# EAGLE board testv1 (EAGLE 6.3)
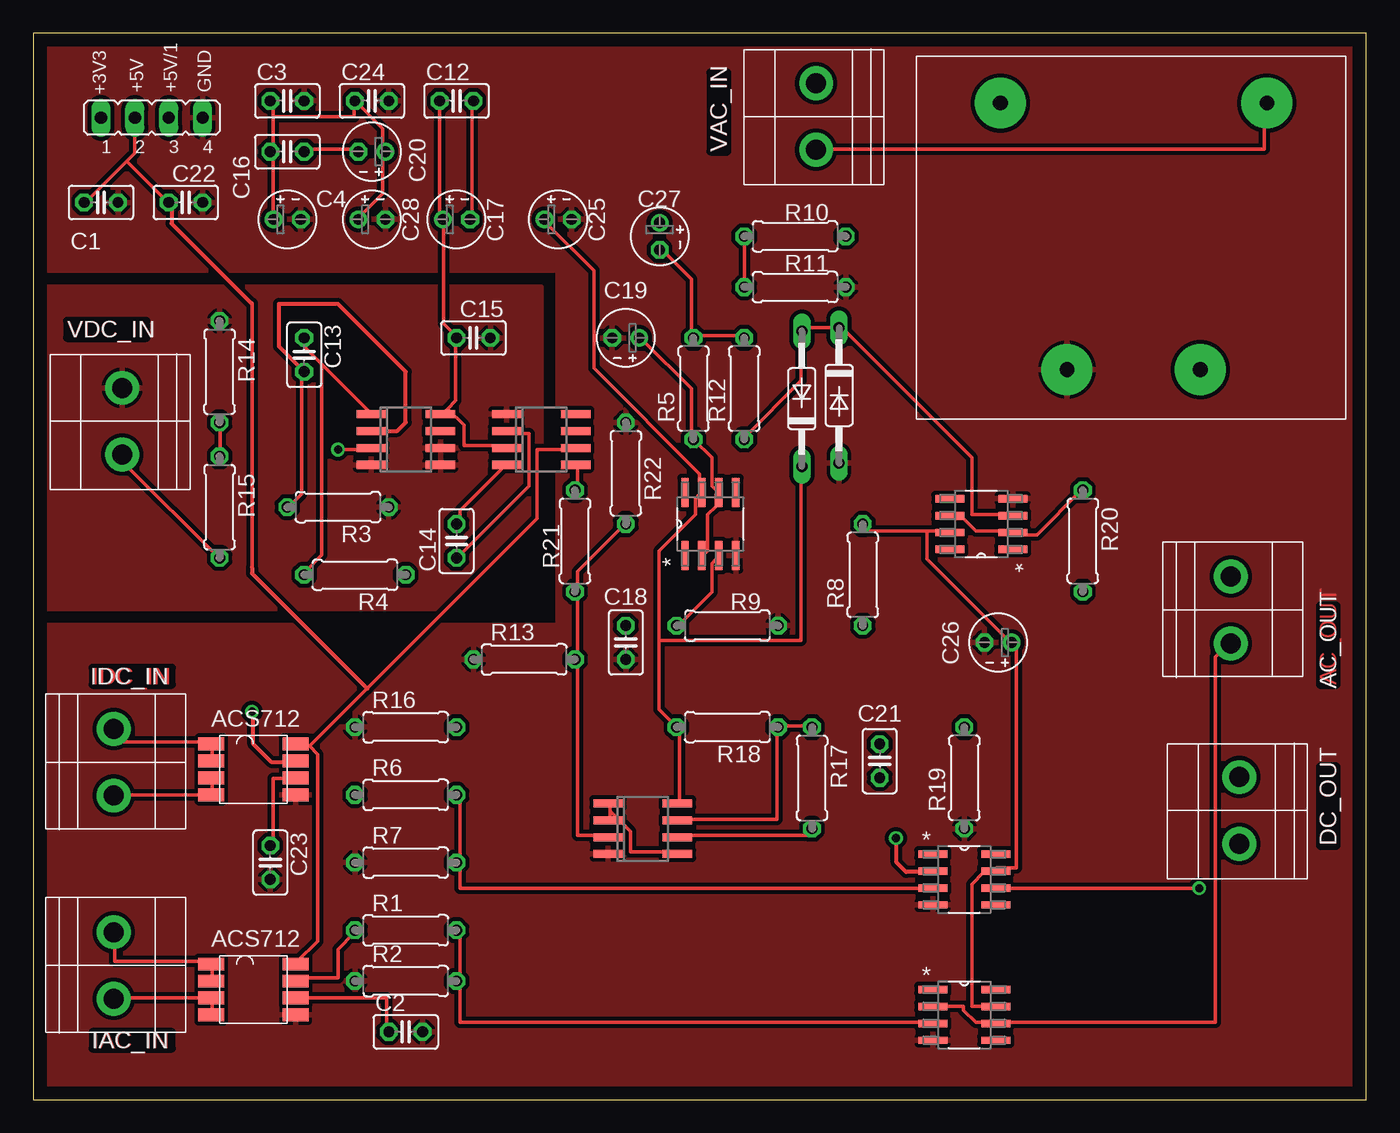
[diagram p0: board, top side]
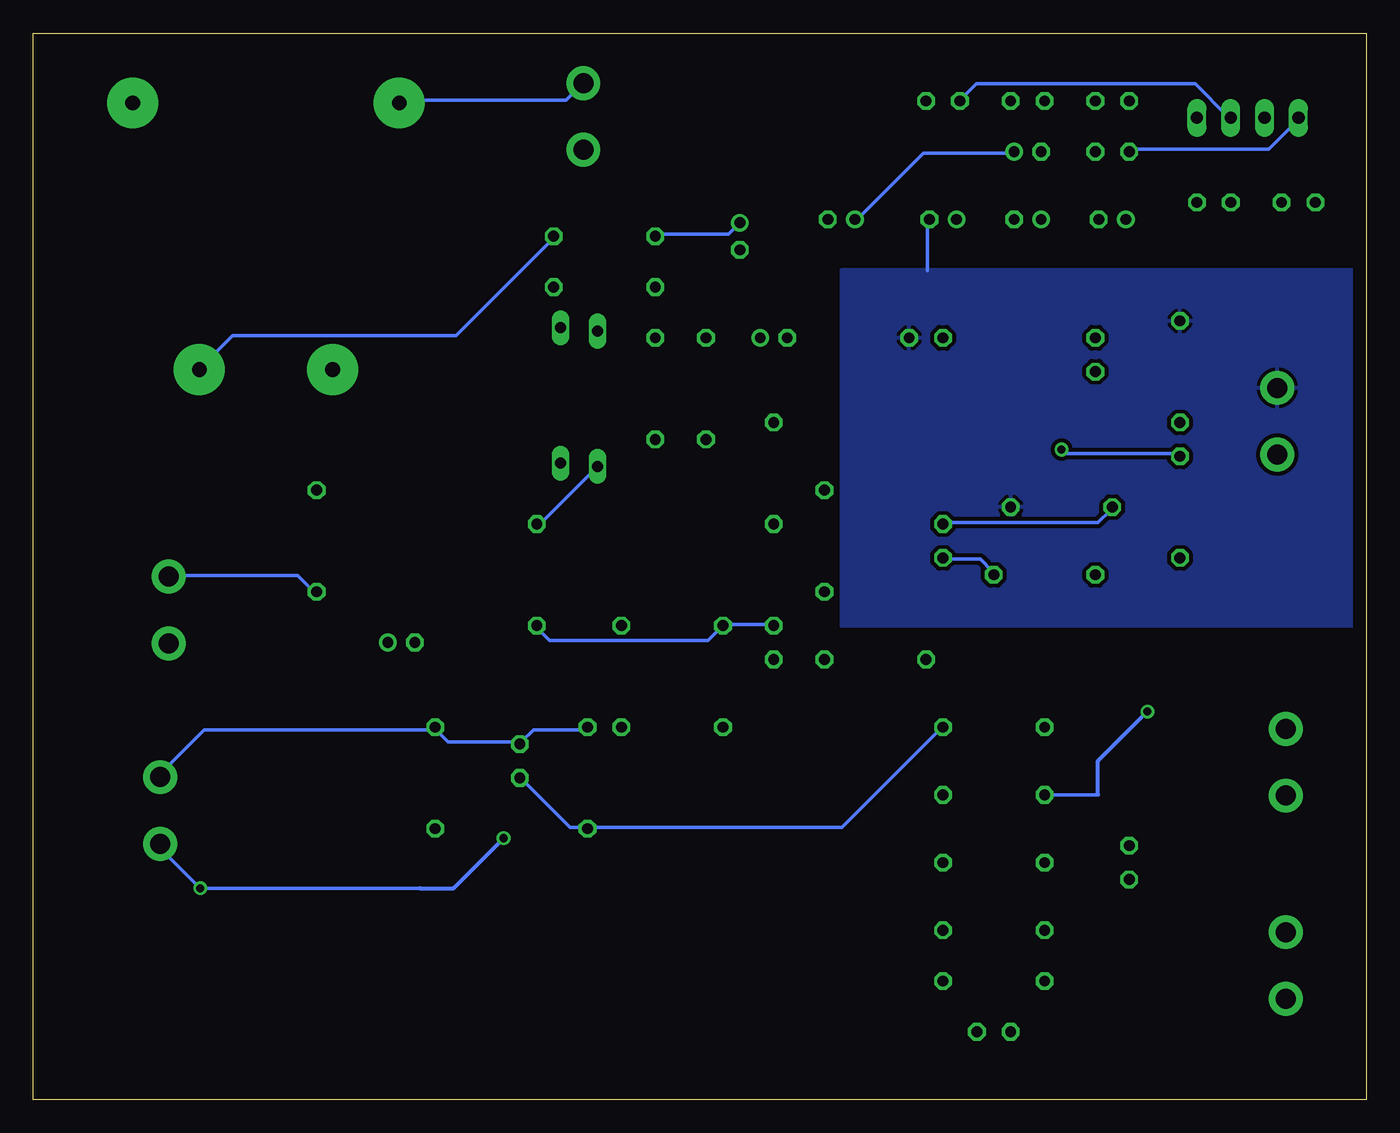
[diagram p1: board, bottom side, seen from below]

Size 100 x 80 mm. Coordinates in mm from the lower left corner, seen from the top.
Outline: 0,0 100,0 100,80 0,80 0,0
Copper layers (1*16): Top 0.035mm / dielectric 1.5mm / Bottom 0.035mm
Design rules "default *": minimum track width 10mil, minimum drill 24mil, track to track 12mil, track to pad 12mil, pad to pad 12mil, via to via 12mil, smd to smd 12mil, copper to edge 40mil, drill to drill 8mil, minimum pad ring 10mil, minimum via ring 8mil, stop-mask expansion 4mil, vias tented up to drill 0mil, thermal gap 10mil

## Footprints (pad centres in the part's own frame; a part is rotated, then mirrored left to right if it is on the bottom)
CTB1500-2 = drill 1.5 pad 2.54: P$1 2.481,5.396; P$2 7.481,5.396
C025-025X050 = drill 0.813 octagon: 1 -1.27,0; 2 1.27,0
E2-4 = drill 0.813 pad 1.27: + -1.016,0 | drill 0.813 pad 1.27 octagon: - 1.016,0
SO08 = smd 0.6 x 2.2: 1 -1.905,-2.6; 2 -0.635,-2.6; 3 0.635,-2.6; 4 1.905,-2.6; 5 1.905,2.6; 6 0.635,2.6; 7 -0.635,2.6; 8 -1.905,2.6
JP4 = drill 0.914 long: 1 -3.81,0; 2 -1.27,0; 3 1.27,0; 4 3.81,0
0207/7 = drill 0.813 octagon: 1 -3.81,0; 2 3.81,0
SOIC127P600X175-8N = smd 2.184 x 0.559: 1 -2.362,1.905; 2 -2.362,0.635; 3 -2.362,-0.635; 4 -2.362,-1.905; 5 2.362,-1.905; 6 2.362,-0.635; 7 2.362,0.635; 8 2.362,1.905
SO8 = smd 0.6 x 2.2: 1 -1.905,-2.6; 2 -0.635,-2.6; 3 0.635,-2.6; 4 1.905,-2.6; 5 1.905,2.6; 6 0.635,2.6; 7 -0.635,2.6; 8 -1.905,2.6
SOIC8 = smd 1.93 x 0.965: 1 -4.445,1.27; 2 -4.445,0; 3 -4.445,-1.27; 4 -4.445,-2.54; 5 1.905,-2.54; 6 1.905,-1.27; 7 1.905,0; 8 1.905,1.27
4408 = drill 1.1 pad 3.81: PIN1 -10,10; PIN5 10,10; PIN7 5,-10; PIN9 -5,-10
D035-10 = drill 0.813 long: A 4.318,0.762; C -5.842,0.762

## Placement (x,y rotation side)
AC_OUT  CTB1500/2  [CTB1500-2]  95.25,31.75 90 top
C1  [C025-025X050]  5.08,67.31 0 top
C2  [C025-025X050]  27.94,5.08 0 top
C3  [C025-025X050]  19.05,74.93 0 top
C4  [E2-4]  19.05,66.04 0 top
C12  [C025-025X050]  31.75,74.93 0 top
C13  [C025-025X050]  20.32,55.88 270 top
C14  [C025-025X050]  31.75,41.91 90 top
C15  [C025-025X050]  33.02,57.15 0 top
C16  [C025-025X050]  19.05,71.12 0 top
C17  [E2-4]  31.75,66.04 0 top
C18  [C025-025X050]  44.45,34.29 270 top
C19  [E2-4]  44.45,57.15 180 top
C20  [E2-4]  25.4,71.12 180 top
C21  [C025-025X050]  63.5,25.4 90 top
C22  [C025-025X050]  11.43,67.31 0 top
C23  [C025-025X050]  17.78,17.78 270 top
C24  [C025-025X050]  25.4,74.93 0 top
C25  [E2-4]  39.37,66.04 0 top
C26  [E2-4]  72.39,34.29 180 top
C27  [E2-4]  46.99,64.77 270 top
C28  [E2-4]  25.4,66.04 0 top
DC_OUT  CTB1500/2  [CTB1500-2]  85.09,26.67 270 top
IAC_IN  CTB1500/2  [CTB1500-2]  11.43,5.08 90 top
IC1  MCP602SN  [SO08]  27.94,49.53 270 top
IC2  MCP602SN  [SO08]  45.72,20.32 270 top
IDC_IN  CTB1500/2  [CTB1500-2]  11.43,20.32 90 top
JP1  [JP4]  8.89,73.66 0 top
R1  [0207/7]  27.94,12.7 0 top
R2  [0207/7]  27.94,8.89 0 top
R3  [0207/7]  22.86,44.45 180 top
R4  [0207/7]  24.13,39.37 180 top
R5  [0207/7]  49.53,53.34 90 top
R6  [0207/7]  27.94,22.86 0 top
R7  [0207/7]  27.94,17.78 0 top
R8  [0207/7]  62.23,39.37 90 top
R9  [0207/7]  52.07,35.56 180 top
R10  [0207/7]  57.15,64.77 180 top
R11  [0207/7]  57.15,60.96 180 top
R12  [0207/7]  53.34,53.34 90 top
R13  [0207/7]  36.83,33.02 0 top
R14  [0207/7]  13.97,54.61 270 top
R15  [0207/7]  13.97,44.45 270 top
R16  [0207/7]  27.94,27.94 0 top
R17  [0207/7]  58.42,24.13 270 top
R18  [0207/7]  52.07,27.94 180 top
R19  [0207/7]  69.85,24.13 90 top
R20  [0207/7]  78.74,41.91 270 top
R21  [0207/7]  40.64,41.91 270 top
R22  [0207/7]  44.45,46.99 270 top
U2  MCP601-E/SN  [SOIC127P600X175-8N]  69.85,6.35 0 top
U3  IL300  [SO8]  38.1,49.53 270 top
U4  MCP601-E/SN  [SOIC127P600X175-8N]  69.85,16.51 0 top
U5  MCP601-E/SN  [SOIC127P600X175-8N]  50.8,43.18 90 top
U6  MCP601-E/SN  [SOIC127P600X175-8N]  71.12,43.18 180 top
U$1  ACS712  [SOIC8]  17.78,8.89 0 top
U$6  [4408]  82.55,64.77 0 top
U$7  SD103A  [D035-10]  58.42,53.34 90 top
U$8  SD103A  [D035-10]  59.69,52.07 270 top
U$10  ACS712  [SOIC8]  17.78,25.4 0 top
VAC_IN  CTB1500/2  [CTB1500-2]  53.34,78.74 270 top
VDC_IN  CTB1500/2  [CTB1500-2]  1.27,55.88 270 top

## Library data of the parts
AC_OUT DC_OUT IAC_IN IDC_IN U3 VAC_IN VDC_IN = eko-parts
C1-C4 C12-C28 R1-R22 = resistor
IC1 IC2 = linear
JP1 = jumper
U2 U4-U6 = mcp; MPN: MCP601-E/SN; OC_FARNELL: 1852039; OC_NEWARK: 88H9865; PACKAGE: SOIC-8; SUPPLIER: Microchip
U$1 U$6-U$8 U$10 = Pauls_parts

## Nets
+3V3: C3.1 C4.+ C16.1 C20.+ C24.1 C25.+ C26.+ C28.+ IC2.8 JP1.1 R8.2 R18.2 U2.7 U4.7 U5.7 U6.7 U$7.C
+5V: C1.1 C22.1 JP1.2 U3.6 U$1.8 U$10.8
+5V/1: C12.1 C15.1 C17.+ IC1.8 JP1.3 U3.3
DC_SENSE: R15.2 VDC_IN.P$2
GND: C1.2 C2.2 C3.2 C4.- C18.2 C19.- C22.2 C23.2 C24.2 C25.- C26.- C28.- IC2.4 JP1.4 R2.1 R7.1 R9.1 R11.1 R13.1 R16.1 R19.1 R22.1 U2.4 U4.4 U5.4 U6.4 U$1.5 U$6.PIN9 U$8.A U$10.5
GND1: C12.2 C15.2 C17.- IC1.4 IC1.5 IC1.6 R3.1 R14.1 U3.1 VDC_IN.P$1
GND2: C16.2 C20.-
IAC_OUT: AC_OUT.P$1 U2.2 U2.6
IDC_OUT: DC_OUT.P$2 U4.2 U4.6
N$1: IAC_IN.P$2 U$1.1 U$1.2
N$2: IAC_IN.P$1 U$1.3 U$1.4
N$3: R1.1 U$1.7
N$4: C2.1 U$1.6
N$5: C13.2 C14.2 IC1.2 R3.2 U3.4
N$6: R1.2 R2.2 U2.3
N$7: C14.1 R4.1 U3.2
N$8: IDC_IN.P$2 U$10.1 U$10.2
N$9: C13.1 IC1.1 R4.2
N$10: C18.1 R8.1 R9.2 U5.3
N$11: C19.+ R5.1 U5.2 U5.6
N$12: R12.1 U6.3 U$7.A U$8.C
N$13: R20.1 U6.2 U6.6
N$14: IC2.3 R13.2 R21.2 R22.2
N$15: R21.1 U3.5
N$17: C27.+ R10.2 R11.2
N$18: R10.1 U$6.PIN7
N$20: IC2.1 IC2.2 IC2.5
N$21: C27.- R5.2 R12.2
N$22: C21.1 IC2.6 R16.2 R17.2
N$25: IC1.3 R14.2 R15.1
N$26: IDC_IN.P$1 U$10.3 U$10.4
N$27: R6.1 U$10.7
N$28: C23.1 U$10.6
N$29: R6.2 R7.2 U4.3
V_IN1: U$6.PIN5 VAC_IN.P$2
V_IN2: U$6.PIN1 VAC_IN.P$1
VAC_OUT: AC_OUT.P$2 R20.2
VDC_OUT: C21.2 DC_OUT.P$1 IC2.7 R17.1 R18.1 R19.2

## Tracks (layer width: path | path; a pad name or v marks a point on that pad's centre or on a via)
+3V3
  Top 0.254: C4.+ 17.98,66.14 17.98,71.02 C16.1 17.98,71.32 17.98,73.76 | 17.98,73.76 17.98,74.68 C3.1 | C28.+ 24.38,66.14 26.21,67.97 26.21,71.02 C20.+ 26.21,71.32 26.21,72.85 C24.1 24.08,74.68 24.08,73.76 17.98,73.76 | 46.94,34.44 46.94,29.26 R18.2 48.46,27.74 48.46,22.25 IC2.8 | 46.94,34.44 46.94,41.15 49.68,43.89 49.68,45.11 49.99,45.41 U5.7 49.99,45.72 49.99,46.94 42.06,54.86 42.06,62.18 38.41,65.84 C25.+ | U2.7 71.93,7.01 70.41,7.01 70.41,16.15 71.32,17.07 71.93,17.07 U4.7 72.24,17.37 73.76,17.37 73.76,33.83 73.46,34.14 C26.+ 73.15,34.44 67.06,40.54 67.06,42.67 | 67.06,42.67 62.48,42.67 62.48,42.98 R8.2 | 67.06,42.67 68.58,42.67 U6.7 | 46.94,34.44 57.61,34.44 57.61,47.24 U$7.C
  Bottom 0.254: JP1.1 5.18,73.46 7.32,71.32 17.68,71.32 C16.1 | C25.+ 38.1,66.14 33.22,71.02 26.52,71.02 C20.+ | U$7.C 61.87,43.28 62.18,43.28 R8.2
+5V
  Top 0.254: 7.01,70.41 7.62,71.02 JP1.2 | 7.01,70.41 3.96,67.36 C1.1 | 7.01,70.41 10.06,67.36 C22.1 10.36,67.06 | 20.73,26.52 21.34,25.91 21.34,11.89 19.81,10.36 U$1.8 | 20.73,26.52 19.81,26.52 U$10.8 | 20.73,26.52 25.04,30.84 37.8,43.59 37.8,48.77 40.54,48.77 U3.6 | 16.41,39.93 16.41,59.69 16.41,59.74
  Top 0.305: 10.36,67.06 10.36,65.73 16.41,59.69 | 16.41,39.93 16.41,39.47 25.04,30.84
+5V/1
  Top 0.254: 31.09,51.82 31.7,52.43 31.7,57 C15.1 31.7,57.3 30.79,58.22 30.79,65.84 C17.+ 30.48,66.14 C12.1 | 31.09,51.82 30.79,51.51 IC1.8 | 31.09,51.82 32.31,50.6 32.31,49.07 35.36,49.07 U3.3
  Bottom 0.254: JP1.3 10.36,73.76 12.8,76.2 29.26,76.2 30.48,74.98 C12.1
DC_SENSE
  Top 0.254: R15.2 13.72,40.84 7.01,47.55 7.01,48.16 VDC_IN.P$2
GND
  pour Top: 100.33,80.01 0,80.01 0,62.23 39.37,62.23 39.37,35.56 0,35.56 0,0 100.33,0
GND1
  Top 0.254: C12.2 32.92,74.68 32.92,66.14 C17.-
  Bottom 0.254: 32.92,62.18 32.92,65.84 C17.-
  pour Top: 0,60.96 38.1,60.96 38.1,36.83 0,36.83
  pour Bottom: 0,62.23 39.37,62.23 39.37,35.56 0,35.56
GND2
  Top 0.254: C16.2 20.42,71.32 24.38,71.32 C20.-
IAC_OUT
  Top 0.254: U2.2 67.67,7.01 69.8,7.01 69.8,6.71 70.71,5.79 71.93,5.79 U2.6 72.24,5.79 88.7,5.79 88.7,33.22 89.61,34.14 AC_OUT.P$1
IDC_OUT  (via drill 0.61)
  Top 0.254: v87.48,15.85 72.24,15.85 U4.6 | 67.67,17.07 U4.2
  Top 0.305: 67.67,17.07 65.48,17.07 64.77,17.78 64.77,19.56 v64.72,19.61
  Bottom 0.254: DC_OUT.P$2 90.53,18.9 v87.48,15.85 71.02,15.85
  Bottom 0.305: 71.02,15.85 68.48,15.85 v64.72,19.61
N$1
  Top 0.254: U$1.2 13.41,9.14 13.41,10.06 U$1.1 13.11,10.36 6.1,10.36 6.1,12.5 IAC_IN.P$2
N$2
  Top 0.254: U$1.4 13.41,6.4 13.41,7.62 U$1.3 6.1,7.62 IAC_IN.P$1
N$3
  Top 0.254: U$1.7 19.81,9.14 22.86,9.14 22.86,11.28 24.08,12.5 R1.1
N$4
  Top 0.254: U$1.6 26.52,7.62 26.52,5.18 C2.1
N$5
  Top 0.254: R3.2 19.2,44.5 20.12,45.41 20.12,54.56 C13.2 | U3.4 35.36,47.55 32,44.2 32,43.28 C14.2 | 25.6,49.99 IC1.2
  Top 0.305: IC1.2 27.3,50.16 27.94,50.8 27.94,54.61 22.86,59.69 18.41,59.69 18.41,56.52 C13.2
  Bottom 0.254: R3.2 19.2,44.2 20.12,43.28 31.7,43.28 C14.2
N$6
  Top 0.254: U2.3 67.36,5.79 32,5.79 32,8.84 R2.2 32,9.14 32,12.5 R1.2
N$7
  Top 0.254: U3.2 35.66,49.99 37.19,49.99 37.19,46.02 32,40.84 C14.1
  Bottom 0.254: R4.1 28.04,39.62 28.96,40.54 31.7,40.54 C14.1
N$8
  Top 0.254: U$10.2 13.41,25.6 13.41,26.52 U$10.1 13.11,26.82 6.1,26.82 6.1,27.74 IDC_IN.P$2
N$9
  Top 0.254: 21.64,55.17 20.42,56.39 20.42,57 C13.1 | 21.64,55.17 25.3,51.51 IC1.1 | 21.64,55.17 21.64,40.84 20.42,39.62 R4.2
N$10
  Top 0.254: U5.3 51.21,40.54 50.9,40.23 50.9,38.1 48.46,35.66 R9.2
  Bottom 0.254: C18.1 44.5,35.66 48.16,35.66 R9.2 49.38,34.44 61.27,34.44 62.18,35.36 R8.1
N$11
  Top 0.254: U5.2 50.29,40.84 50.6,41.15 50.6,43.89 51.21,44.5 51.21,45.41 U5.6 51.21,45.72 50.9,46.02 50.9,48.16 R5.1 49.38,49.68 49.38,53.34 45.72,57 C19.+
N$12
  Top 0.254: R12.1 53.34,49.68 57.61,53.95 57.61,57.61 U$7.A 57.91,57.91 U$8.C 60.66,57.91 70.41,48.16 70.41,43.89 73.46,43.89 U6.3
N$13
  Top 0.254: U6.6 68.89,43.59 69.8,43.59 70.71,42.67 73.46,42.67 U6.2 73.76,42.37 75.29,42.37 78.64,45.72 R20.1
N$14
  Top 0.254: IC2.3 42.98,19.81 40.84,19.81 40.84,32.92 R13.2 40.84,33.22 40.84,38.1 | 40.84,38.1 40.84,39.62 44.2,42.98 R22.2 | 40.84,38.1 R21.2
N$15
  Top 0.254: U3.5 40.84,47.55 40.84,45.72 R21.1
N$17
  Top 0.254: R10.2 R11.2
  Bottom 0.254: C27.+ 47.85,64.92 53.34,64.92 R10.2
N$18
  Bottom 0.254: R10.1 60.96,64.62 68.28,57.3 85.04,57.3 87.48,54.86 U$6.PIN7
N$20
  Top 0.254: 43.28,21.64 43.28,21.95 IC2.1 | 43.28,21.64 43.28,21.03 IC2.2 | 43.28,21.64 44.81,20.12 44.81,18.59 48.16,18.59 IC2.5
N$21
  Top 0.254: R12.2 53.34,57.3 49.68,57.3 R5.2 49.38,57.3 49.38,61.57 47.24,63.7 C27.-
N$22
  Top 0.254: IC2.6 48.46,19.81 58.22,19.81 58.22,20.12 R17.2
  Bottom 0.254: R16.2 32,27.74 39.32,20.42 58.22,20.42 R17.2 58.52,20.42 59.74,20.42 63.4,24.08 C21.1
N$25  (via drill 0.61)
  Top 0.254: v22.86,48.77 25.3,48.77 IC1.3 | R14.2 14.02,50.6 14.02,48.46 R15.1
  Bottom 0.254: v22.86,48.77 22.55,48.46 14.02,48.46 R15.1
N$26
  Top 0.254: U$10.3 13.41,24.08 13.41,22.86 U$10.4 6.1,22.86 IDC_IN.P$1
N$27  (via drill 0.61)
  Top 0.254: 19.51,25.3 U$10.7
  Top 0.305: 19.51,25.3 17.88,25.3 16.51,26.67 16.51,29.01 v16.41,29.11
  Bottom 0.254: R6.1 20.12,22.86
  Bottom 0.305: 20.12,22.86 20.12,25.4 v16.41,29.11
N$28
  Top 0.254: U$10.6 19.51,24.08 17.98,24.08 17.98,19.2 C23.1
N$29
  Top 0.254: U4.3 67.36,15.85 32,15.85 32,17.68 R7.2 32,17.98 32,22.86 R6.2
V_IN1
  Top 0.254: VAC_IN.P$2 59.13,71.32 92.35,71.32 92.35,74.68 U$6.PIN5
V_IN2
  Bottom 0.254: VAC_IN.P$1 59.13,75.89 60.05,74.98 72.54,74.98 U$6.PIN1
VAC_OUT
  Bottom 0.254: R20.2 78.94,38.1 80.16,39.32 89.61,39.32 AC_OUT.P$2
VDC_OUT
  Top 0.254: IC2.7 48.46,21.03 55.78,21.03 55.78,27.74 R18.1 56.08,28.04 58.22,28.04 R17.1
  Bottom 0.254: R17.1 58.52,27.74 62.48,27.74 63.4,26.82 C21.2 63.7,26.82 68.89,26.82 69.8,27.74 R19.2 70.1,27.74 87.17,27.74 90.53,24.38 DC_OUT.P$1

## Text on the board
Top: VAC_IN | VDC_IN | IDC_IN | AC_OUT | DC_OUT | IAC_IN
tPlace: +3V3 | +5V | +5V/1 | GND